# Altium PCB STM32_FYP_Digital_In_Module.PcbDoc
Units mm, origin at the board's own origin, x right, y up, seen from the top; angles counter-clockwise.
Board outline 70 x 52.5 mm, 2 copper layers (Top Layer, Bottom Layer); 25 components, 22 nets, 102 pads, 131 vias.
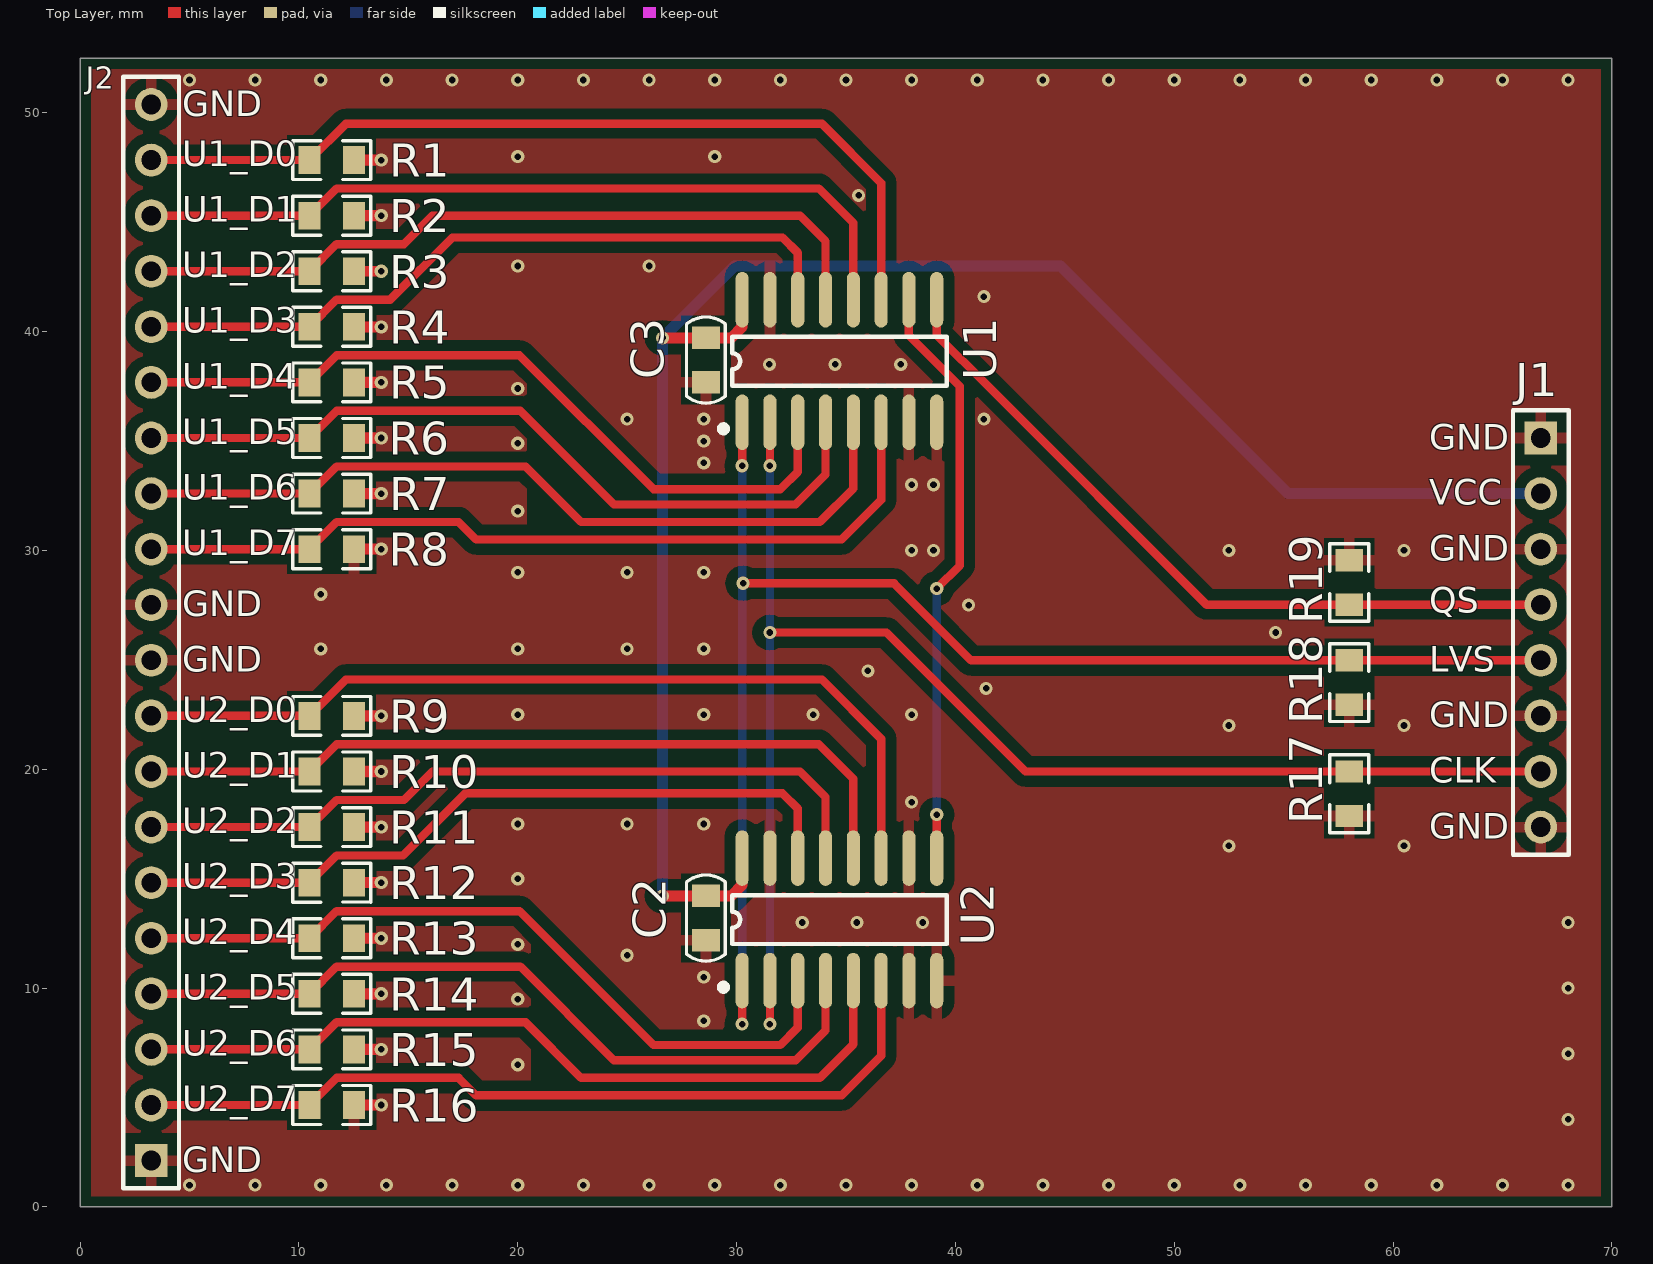
[diagram p0: Top Layer view]
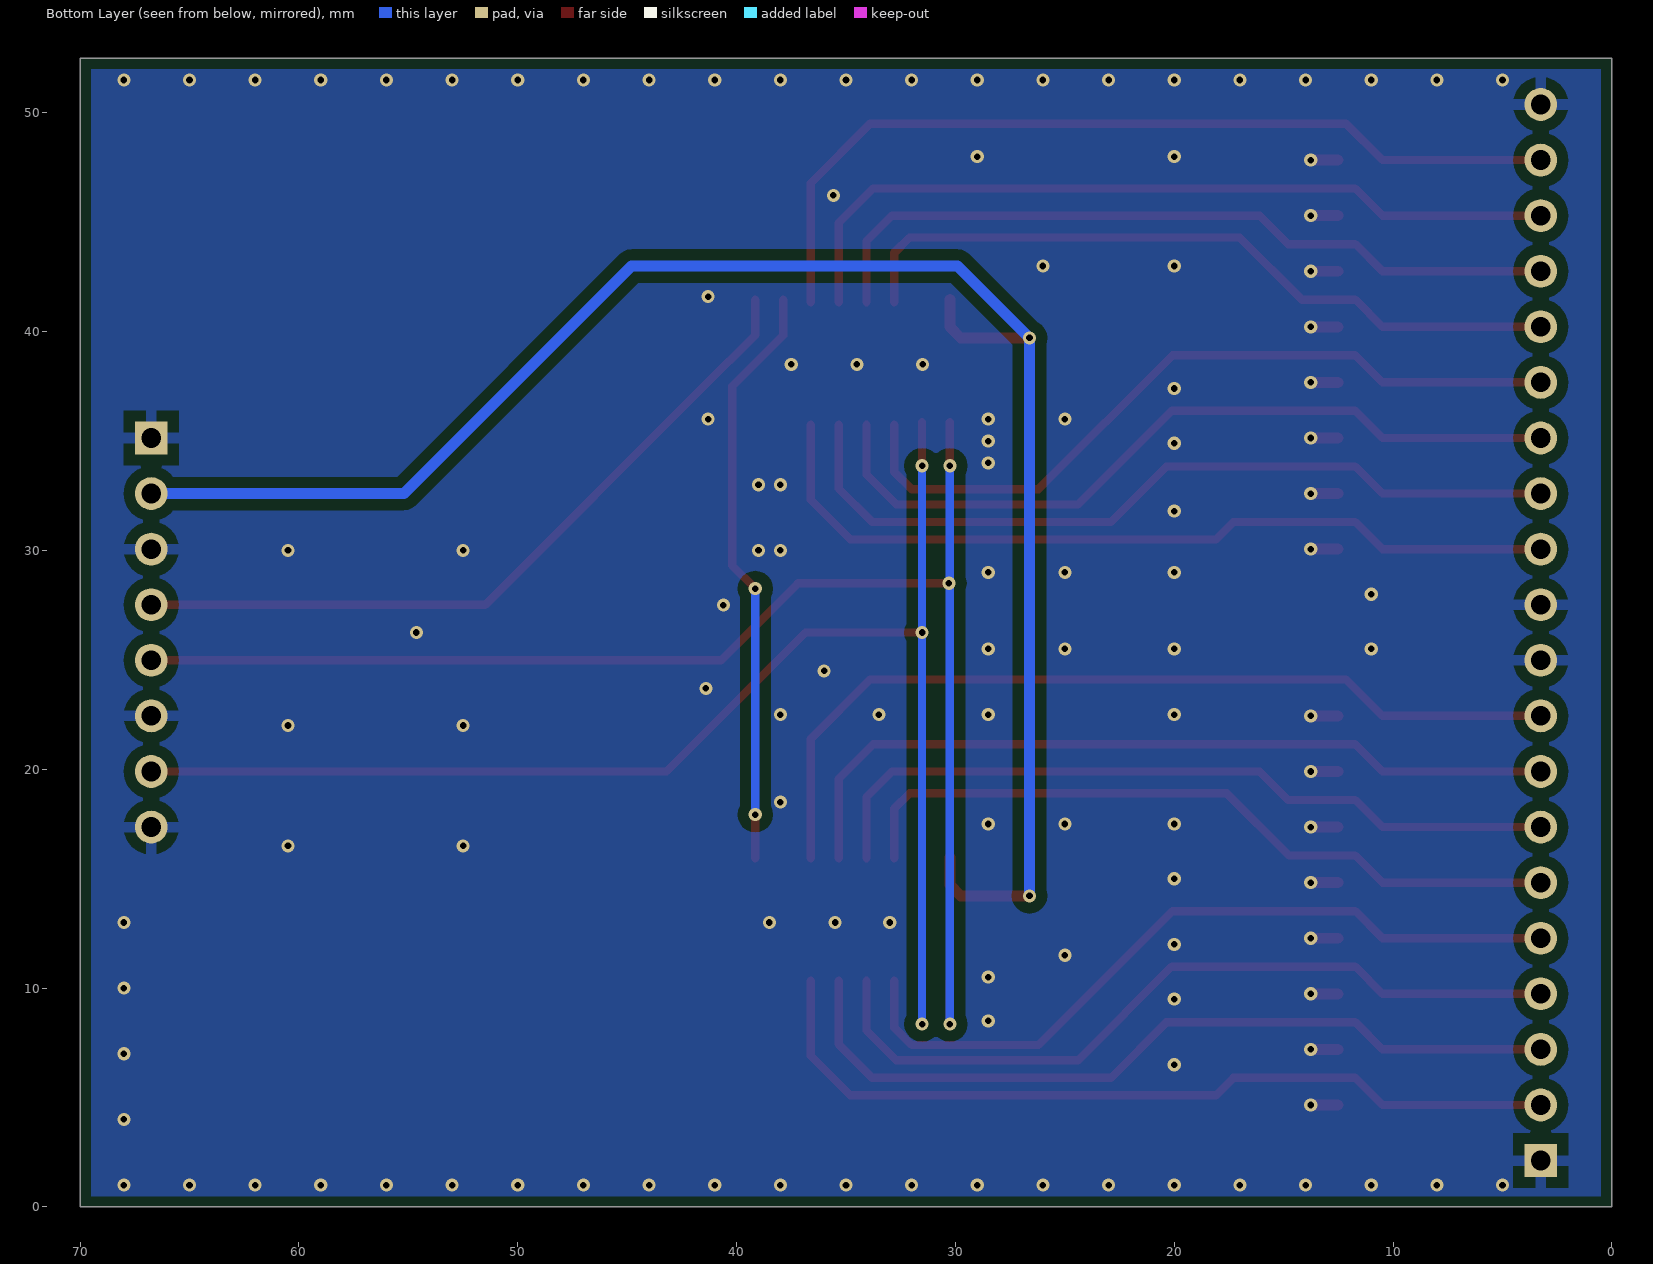
[diagram p1: Bottom Layer view, seen from below]
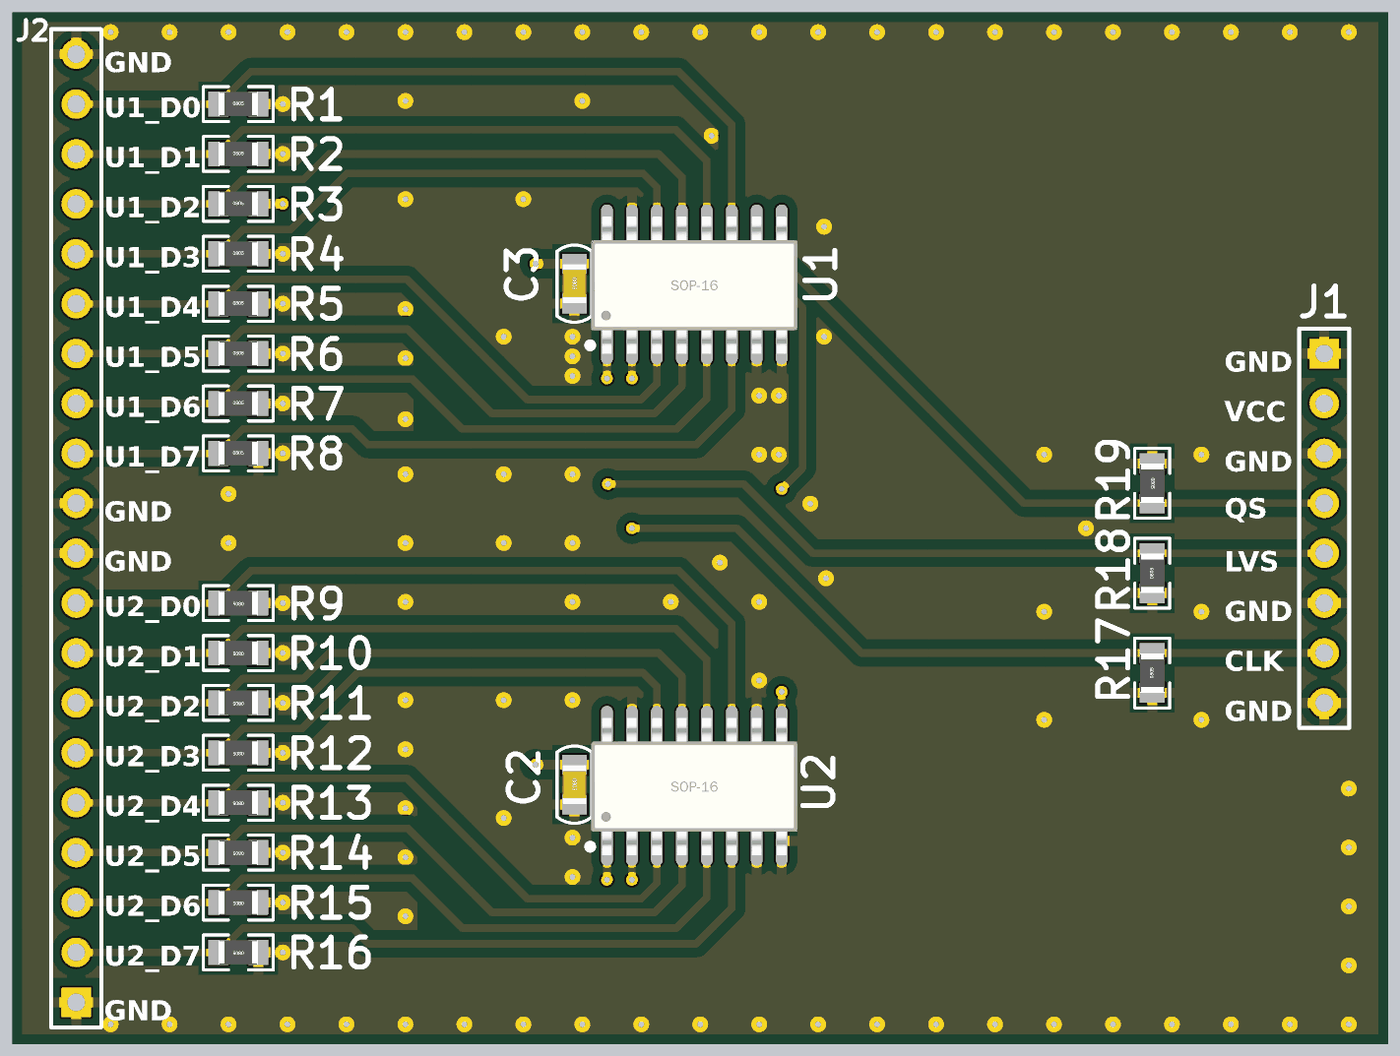
[diagram p2: 3D render of the assembled board from above, using the file's embedded part models]

## Layer stack, top to bottom
Top Solder: solder mask 0.0102, Solder Resist, Dk 3.5
Top Layer: signal copper 0.0356
Dielectric 1: dielectric 0.32, FR-4, Dk 4.8
Bottom Layer: signal copper 0.0356
Bottom Solder: solder mask 0.0102, Solder Resist, Dk 3.5

## Board outline
0,0 0,52.5 70,52.5 70,0

## Design rules (kind name [scope] priority, off if disabled: settings)
Clearance Clearance_1 [All vs InPolygon] p1: gap=0.5 ignorepadtopadclearanceinfootprint=FALSE except(0: Arc-Hole Track-Hole SMDPad-Hole THPad-Hole Via-Hole Fill-Hole Poly-Hole Region-Hole Text-Hole)
Clearance [All] p2: gap=0.3 ignorepadtopadclearanceinfootprint=FALSE
ComponentClearance [All] p1: gap=-5 collisioncheckmode=3 verticalgap=0.254 showdistances=FALSE
FabricationTestPointUsage TestPointUsage [All] p1: valid=0 allowmultiple=FALSE
FabricationTestpoint Testpoint [(IsPad And (OnTopLayer Or OnBottomLayer))] p1: side=3 testpointundercomponent=TRUE minsize=1.016 maxsize=2.54 preferedsize=1.524 minholesize=0 maxholesize=1.016 preferedholesize=0.813 testpointgrid=0.025 allowsidetop=TRUE allowsidebottom=TRUE usegrid=TRUE gridtolerance=0
HoleSize [All] p1: absolutevalues=TRUE maxlimit=10 minlimit=0.025 maxpercent=80.000 minpercent=20.000
HoleToHoleClearance [All] p1: gap=0 allowstackedmicrovias=TRUE
MinimumSolderMaskSliver [All] p1: minsoldermaskwidth=0
NetAntennae [All] p1 off: netantennaetolerance=0
PlaneConnect [All] p1: planeconnectstyle=Direct reliefexpansion=0.508 reliefentries=4 reliefconductorwidth=0.254 reliefairgap=0.254
PolygonConnect IsVia [All vs IsVia] p1: connectstyle=Direct reliefconductorwidth=0.508 reliefentries=4 polygonreliefangle="90 Angle" airgapwidth=0.254
PolygonConnect PolygonConnect_1 [All] p2: connectstyle=Relief reliefconductorwidth=0.508 reliefentries=4 polygonreliefangle="90 Angle" airgapwidth=0.5
RoutingVias [All] p1: holewidth=0.4 width=0.7 viastyle="Through Hole" minholewidth=0.3 minwidth=0.6 maxholewidth=1.2 maxwidth=2
SilkToSilkClearance [All] p1: silktosilkclearance=0
SilkToSolderMaskClearance [IsPad] p1: minsilkscreentomaskgap=0 clearancetoexposedcopper=TRUE
SolderMaskExpansion [All] p1: expansion=0.102 istentingtop=FALSE
Width [All] p1: maxlimit=10 minlimit=0.2 preferedwidth=0.6
20 further rules are at their usual default settings.

## Components (designator, comment, footprint, x,y, rotation, side; value= is the part's Value field where it differs from the comment)
C2 "0.1uF" 0805C_M 28.6,13.2 r270 top
C3 "0.1uF" 0805C_M 28.6,38.7 r270 top
J1 "Header8" 8P-2.54-H 66.75,35.14 r270 top
J2 "Header20" 20P-2.54-H 3.25,2.12 r90 top
R1 "1M" 0805R_M 11.5,47.84 r0 top
R2 "1M" 0805R_M 11.5,45.3 r0 top
R3 "1M" 0805R_M 11.5,42.76 r0 top
R4 "1M" 0805R_M 11.5,40.22 r0 top
R5 "1M" 0805R_M 11.5,37.68 r0 top
R6 "1M" 0805R_M 11.5,35.14 r0 top
R7 "1M" 0805R_M 11.5,32.6 r0 top
R8 "1M" 0805R_M 11.5,30.06 r0 top
R9 "1M" 0805R_M 11.5,22.44 r180 top
R10 "1M" 0805R_M 11.5,19.9 r180 top
R11 "1M" 0805R_M 11.5,17.36 r180 top
R12 "1M" 0805R_M 11.5,14.82 r180 top
R13 "1M" 0805R_M 11.5,12.28 r180 top
R14 "1M" 0805R_M 11.5,9.74 r180 top
R15 "1M" 0805R_M 11.5,7.2 r180 top
R16 "1M" 0805R_M 11.5,4.66 r180 top
R17 "1M" 0805R_M 58,18.884 r90 top
R18 "1M" 0805R_M 58,23.964 r90 top
R19 "1M" 0805R_M 58,28.536 r270 top
U1 "74HC165" SOIC-16_150mil 34.7,38.659 r90 top
U2 "74HC165" SOIC-16_150mil 34.7,13.141 r90 top

## Footprints (in the part's own frame and the unit in brackets; to place one, negate y for a bottom-side part, rotate by r counter-clockwise, add the part's x,y. Pads: shape width x height; smd on the part's side, far side on the other; paste and mask are expansions set on the pad)
8P-2.54-H [mm] "Connector; Header; 8 Position"
  rect 1.5x1.5 hole 0.9: 1(0,0)
  round 1.5 hole 0.9: 2(2.54,0) 3(5.08,0) 4(7.62,0) 5(10.16,0) 6(12.7,0) 7(15.24,0) 8(17.78,0)
  silkscreen extent -1.27,-1.27 19.05,1.27
20P-2.54-H [mm] "Connector; Header; 20Position"
  rect 1.5x1.5 hole 0.9: 1(0,0)
  round 1.5 hole 0.9: 2(2.54,0) 3(5.08,0) 4(7.62,0) 5(10.16,0) 6(12.7,0) 7(15.24,0) 8(17.78,0) 9(20.32,0) 10(22.86,0) 11(25.4,0) 12(27.94,0) 13(30.48,0) 14(33.02,0) 15(35.56,0) 16(38.1,0) 17(40.64,0) 18(43.18,0) 19(45.72,0) 20(48.26,0)
  silkscreen extent -1.27,-1.27 49.53,1.27
0805C_M [mil] "Chip Capacitance, Body 2.0x1.2mm, IPC Low Density"
  rect 40x50 smd: 1(-40,0) 2(40,0)
  silkscreen extent -78,-35 78,35, body extent -39,-24 39,24, height 20
0805R_M [mil] "Chip Resistor, Body 2.0x1.2mm, IPC Low Density"
  rect 40x50 smd: 1(-40,0) 2(40,0)
  silkscreen extent -70,-35 70,35, body extent -39,-25 39,25, height 20
SOIC-16_150mil [mm] "SOIC, 16-Leads, Body 9.9x3.8mm (max), Pitch 1.27mm"
  oval 2.54x0.6 smd: 1(-2.8,4.445) 2(-2.8,3.175) 3(-2.8,1.905) 4(-2.8,0.635) 5(-2.8,-0.635) 6(-2.8,-1.905) 7(-2.8,-3.175) 8(-2.8,-4.445) 9(2.8,-4.445) 10(2.8,-3.175) 11(2.8,-1.905) 12(2.8,-0.635) 13(2.8,0.635) 14(2.8,1.905) 15(2.8,3.175) 16(2.8,4.445)
  silkscreen extent -3.25,-4.9 1.1,5.45, body extent -3.54,-5.25 3.46,5.25, height 1.9

## Part data
C2 C3: library part Cap, "无极性电容", LatestRevisionDate=17-Jul-2002, LatestRevisionNote="Re-released for DXP Platform.", PackageDescription="Radial Cap, Thru-Hole; 2 Leads; 0.3 in Pin Spacing", PackageReference=RAD-0.3, Published=8-Jun-2000, Publisher="Altium Limited"
J1: "8PIN插座"
J2: "20PIN插座"
R1 R2 R3 R4 R5 R6 R7 R8 R9 R10 R11 R12 R13 R14 R15 R16 R17 R18 R19: library part Res, "电阻", LatestRevisionDate=17-Jul-2002, LatestRevisionNote="Re-released for DXP Platform.", PackageDescription="Axial Device, Thru-Hole; 2 Leads; 0.4 in Pin Spacing", PackageReference=AXIAL-0.4, Published=8-Jun-2000, Publisher="Altium Limited"
U1 U2: "并入串出移位寄存器"

## Via types
v1: diameter 0.6, hole 0.3, Top Layer to Bottom Layer, 131 vias

## Nets (pads, with @x,y where several pads share a name; then routed paths per layer and width w, separated by ;. In a path a pad name is that pad's centre, name@x,y a point inside that pad or via, vN(x,y) a via of type N, cw(c..) or ccw(c..) an arc to the next point about the centre after c; other vN are vias at no path point)
CLK: J1.7 R17.2 U1.2 U2.2 | length 67.4
  Top Layer w0.381: v1@31.506,26.25 36.85,26.25 43.2,19.9 R17.2 J1.7 ; v1(31.525,8.355) U2.2 ; v1(31.525,33.874) U1.2
  Bottom Layer w0.381: v1(31.525,8.355) v1(31.525,33.874)
  other v1: 31.525,26.25
GND: C2.2 C3.2 J1.1 J1.3 J1.6 J1.8 J2.1 J2.10 J2.11 J2.20 R1.2 R2.2 R3.2 R4.2 R5.2 R6.2 R7.2 R8.2 R9.1 R10.1 R11.1 R12.1 R13.1 R14.1 R15.1 R16.1 R17.1 R18.1 R19.1 U1.7 U1.8 U1.15 U2.7 U2.8 U2.10 U2.15 | length 19.9
  Top Layer w0.5: R16.1 v1(13.76,4.66) ; R15.1 v1(13.76,7.2) ; R14.1 v1(13.76,9.74) ; R13.1 v1(13.76,12.28) ; R12.1 v1(13.76,14.82) ; R11.1 v1(13.76,17.36) ; R10.1 v1(13.76,19.9) ; R9.1 v1(13.76,22.44) ; R8.2 v1(13.76,30.06) ; R7.2 v1(13.76,32.6) ; R6.2 v1(13.76,35.14) ; R5.2 v1(13.76,37.68) ; R4.2 v1(13.76,40.22) ; R3.2 v1(13.76,42.76) ; R2.2 v1(13.76,45.3) ; R1.2 v1(13.76,47.84)
  other v1: 5,1 8,1 11,1 14,1 17,1 20,1 23,1 26,1 29,1 32,1 35,1 38,1 41,1 44,1 47,1 50,1 53,1 56,1 59,1 62,1 65,1 68,1 68,4 20,6.5 68,7 28.5,8.5 20,9.5 68,10 28.5,10.5 25,11.5 20,12 33,13 35.5,13 38.5,13 68,13 20,15 52.5,16.5 60.5,16.5 20,17.5 25,17.5 28.5,17.5 38,18.5 52.5,22 60.5,22 20,22.5 28.5,22.5 33.5,22.5 38,22.5 41.4,23.7 36,24.5 11,25.5 20,25.5 25,25.5 28.5,25.5 54.629,26.25 40.6,27.5 11,28 20,29 25,29 28.5,29 38,30 39,30 52.5,30 60.5,30 20,31.8 38,33 39,33 28.5,34 20,34.9 28.5,35 25,36 28.5,36 41.3,36 20,37.4 31.5,38.5 34.5,38.5 37.5,38.5 41.3,41.6 20,43 26,43 35.577,46.226 20,48 29,48 5,51.5 8,51.5 11,51.5 14,51.5 17,51.5 20,51.5 23,51.5 26,51.5 29,51.5 32,51.5 35,51.5 38,51.5 41,51.5 44,51.5 47,51.5 50,51.5 53,51.5 56,51.5 59,51.5 62,51.5 65,51.5 68,51.5
LVS: J1.5 R18.2 U1.1 U2.1 | length 67.4
  Top Layer w0.381: v1(30.255,8.355) U2.1 ; v1(30.255,33.874) U1.1 ; v1(30.3,28.5) 37.2,28.5 40.72,24.98 R18.2 J1.5
  Bottom Layer w0.381: v1(30.255,8.355) v1(30.255,33.874)
NetU1_10: U1.10 U2.9 | length 26.9
  Top Layer w0.381: U1.10 37.875,39.825 40.2,37.5 40.2,29.31 v1(39.145,28.255) ; U2.9 v1(39.145,17.926)
  Bottom Layer w0.381: v1(39.145,17.926) v1(39.145,28.255)
U1_D0: J2.19 R1.1 U1.11 | length 40.6
  Top Layer w0.381: J2.19 R1.1 12.144,49.5 33.9,49.5 36.605,46.795 U1.11@36.605,41.341
U1_D1: J2.18 R2.1 U1.12 | length 36.9
  Top Layer w0.381: J2.18 R2.1 11.726,46.542 33.758,46.542 35.335,44.965 U1.12@35.335,41.341
U1_D2: J2.17 R3.1 U1.13 | length 35.1
  Top Layer w0.381: J2.17 R3.1 11.724,44 14.8,44 16.1,45.3 32.9,45.3 34.065,44.135 U1.13@34.065,41.341
U1_D3: J2.16 R4.1 U1.14 | length 33.8
  Top Layer w0.381: J2.16 R4.1 11.724,41.46 14.173,41.46 17.013,44.3 32.1,44.3 32.795,43.605 U1.14@32.795,41.341
U1_D4: J2.15 R5.1 U1.3 | length 35.1
  Top Layer w0.381: J2.15 R5.1 11.724,38.92 20.08,38.92 26.2,32.8 32,32.8 32.795,33.595 U1.3@32.795,35.741
U1_D5: J2.14 R6.1 U1.4 | length 35.9
  Top Layer w0.381: J2.14 R6.1 11.724,36.38 20.12,36.38 24.4,32.1 32.7,32.1 34.065,33.465 U1.4@34.065,35.741
U1_D6: J2.13 R7.1 U1.5 | length 37.2
  Top Layer w0.381: J2.13 R7.1 11.724,33.84 20.36,33.84 22.9,31.3 33.8,31.3 35.335,32.835 U1.5@35.335,35.741
U1_D7: J2.12 R8.1 U1.6 | length 38.4
  Top Layer w0.381: J2.12 R8.1 11.724,31.3 17.3,31.3 18.1,30.5 34.8,30.5 36.605,32.305 U1.6@36.605,35.741
U1_QS: J1.4 R19.2 U1.9 | length 34.3
  Top Layer w0.381: U1.9 39.145,39.855 41.516,37.484 51.48,27.52 R19.2 J1.4
U2_D0: J2.9 R9.2 U2.11 | length 40.6
  Top Layer w0.381: J2.9 R9.2 12.144,24.1 33.9,24.1 36.605,21.395 U2.11
U2_D1: J2.8 R10.2 U2.12 | length 36.9
  Top Layer w0.381: J2.8 R10.2 11.726,21.142 33.758,21.142 35.335,19.565 U2.12
U2_D2: J2.7 R11.2 U2.13 | length 35.1
  Top Layer w0.381: J2.7 R11.2 11.724,18.6 14.8,18.6 16.1,19.9 32.9,19.9 34.065,18.735 U2.13
U2_D3: J2.6 R12.2 U2.14 | length 33.8
  Top Layer w0.381: J2.6 R12.2 11.724,16.06 14.76,16.06 17.6,18.9 32.1,18.9 32.795,18.205 U2.14
U2_D4: J2.5 R13.2 U2.3 | length 35.1
  Top Layer w0.381: J2.5 R13.2 11.724,13.52 20.08,13.52 26.2,7.4 32,7.4 32.795,8.195 U2.3
U2_D5: J2.4 R14.2 U2.4 | length 35.9
  Top Layer w0.381: J2.4 R14.2 11.724,10.98 20.12,10.98 24.4,6.7 32.7,6.7 34.065,8.065 U2.4
U2_D6: J2.3 R15.2 U2.5 | length 37.2
  Top Layer w0.381: J2.3 R15.2 11.724,8.44 20.36,8.44 22.9,5.9 33.8,5.9 35.335,7.435 U2.5
U2_D7: J2.2 R16.2 U2.6 | length 38.4
  Top Layer w0.381: J2.2 R16.2 11.724,5.9 17.3,5.9 18.1,5.1 34.8,5.1 36.605,6.905 U2.6
VCC: C2.1 C3.1 J1.2 U1.16 U2.16 | length 81.5
  Top Layer w0.5: v1(26.614,14.216) C2.1 29.755,14.216 30.255,14.716 U2.16@30.255,15.959 ; v1(26.614,39.716) C3.1 29.755,39.716 30.255,40.216 U1.16
  Bottom Layer w0.5: v1(26.614,14.216) v1(26.614,39.716) 29.898,43 44.8,43 55.2,32.6 J1.2

## Polygon pours and split planes (outlines as drawn)
GND on Bottom Layer "NONET_L-01_P-001" (solid, pour order 0): 0.5,52 69.5,52 69.5,0.5 0.5,0.5
GND on Top Layer "NONET_L-01_P-001" (solid, remove dead copper, pour order 1): 0.5,52 69.5,52 69.5,0.5 0.5,0.5

## Other copper
Top Layer:
  pour cut-out: 20.6,12.6 20.6,5 20.9,4.7 22.532,6.332 22.532,11.068
  pour cut-out: 20.4,38 20.4,31 21.4,30 23.14,31.74 23.14,35.86

## Silkscreen, mask and mechanical layers (free items; w line width, h text height)
Top Overlay:
  text "GND" at 4.66,49.465 h2
  text "U1_D0" at 4.661,47.169 h2
  text "U1_D1" at 4.661,44.629 h2
  text "U1_D2" at 4.661,42.089 h2
  text "U1_D3" at 4.661,39.549 h2
  text "U1_D4" at 4.661,37.009 h2
  text "U1_D5" at 4.661,34.469 h2
  text "GND" at 61.66,34.225 h2
  text "U1_D6" at 4.661,31.929 h2
  text "VCC" at 61.661,31.692 h2
  text "U1_D7" at 4.661,29.389 h2
  text "GND" at 61.66,29.145 h2
  text "QS" at 61.661,26.765 h2
  text "GND" at 4.66,26.605 h2
  text "GND" at 4.66,24.065 h2
  text "LVS" at 61.661,24.065 h2
  text "U2_D0" at 4.661,21.769 h2
  text "GND" at 61.66,21.525 h2
  text "U2_D1" at 4.661,19.229 h2
  text "CLK" at 61.661,18.992 h2
  text "U2_D2" at 4.661,16.689 h2
  text "GND" at 61.66,16.445 h2
  text "U2_D3" at 4.661,14.149 h2
  text "U2_D4" at 4.661,11.609 h2
  text "U2_D5" at 4.661,9.069 h2
  text "U2_D6" at 4.661,6.529 h2
  text "U2_D7" at 4.661,3.989 h2
  text "GND" at 4.66,1.205 h2
Mechanical 1:
  the board outline again, w0.254